# EAGLE board WEEK3-LAB03 (EAGLE 7.6.0)

Size 56.82 x 53.33 mm. Coordinates in mm from the lower left corner, seen from the top.
Outline: 0,0 56.82,0 56.82,53.33 0,53.33 0,0
Copper layers (1*16): Top 0.035mm / dielectric 1.5mm / Bottom 0.035mm
Design rules "default": minimum track width 10mil, minimum drill 24mil, track to track 8mil, track to pad 8mil, pad to pad 8mil, via to via 8mil, smd to smd 8mil, copper to edge 40mil, drill to drill 8mil, minimum pad ring 10mil, minimum via ring 8mil, stop-mask expansion 4mil, vias tented up to drill 0mil, thermal gap 10mil

## Footprints (pad centres in the part's own frame; a part is rotated, then mirrored left to right if it is on the bottom)
CR2032H = drill 1.118 pad 2.54 octagon: + 5.08,10.795; +@1 -5.08,10.795; - 0,-6.985
LED5MM = drill 0.813 octagon: A -1.27,0; K 1.27,0
PHOTORESISTOR-2.54 = drill 1 pad 1.5: P$1 -1.27,0; P$2 1.27,0
0207/10 = drill 0.813 octagon: 1 -5.08,0; 2 5.08,0
TO92 = drill 0.813 octagon: 1 1.27,0; 2 0,1.905; 3 -1.27,0

## Placement (x,y rotation side)
BAT1  [CR2032H]  5,22.78 0 top
D1  [LED5MM]  5,60.88 0 top  (outside the outline)
Q1  [PHOTORESISTOR-2.54]  5,10.08 0 top
R1  10k‎Ω  [0207/10]  5,35.48 0 top
T1  [TO92]  5,48.18 0 top

## Library data of the parts
BAT1 D1 Q1 R1 T1 = AUTODESK_CIRCUITS_BREADBOARD

## Nets
N$1: Q1.P$1 R1.2 T1.2
N$2: D1.A T1.1
N$3: BAT1.+ BAT1.+@1 R1.1 T1.3
N$4: BAT1.- D1.K Q1.P$2

## Tracks (layer width: path | path; a pad name or v marks a point on that pad's centre or on a via)
N$1  (2 unrouted)
N$2  (1 unrouted)
N$3  (3 unrouted)
N$4  (2 unrouted)